# Altium PCB Sheet1.PCBDOC
Units mil, origin at the board's own origin, x right, y up, seen from the top; angles counter-clockwise.
Board outline 11800 x 7870 mil, 2 copper layers (Top Layer, Bottom Layer); 9 components, 16 nets, 62 pads, 0 vias.
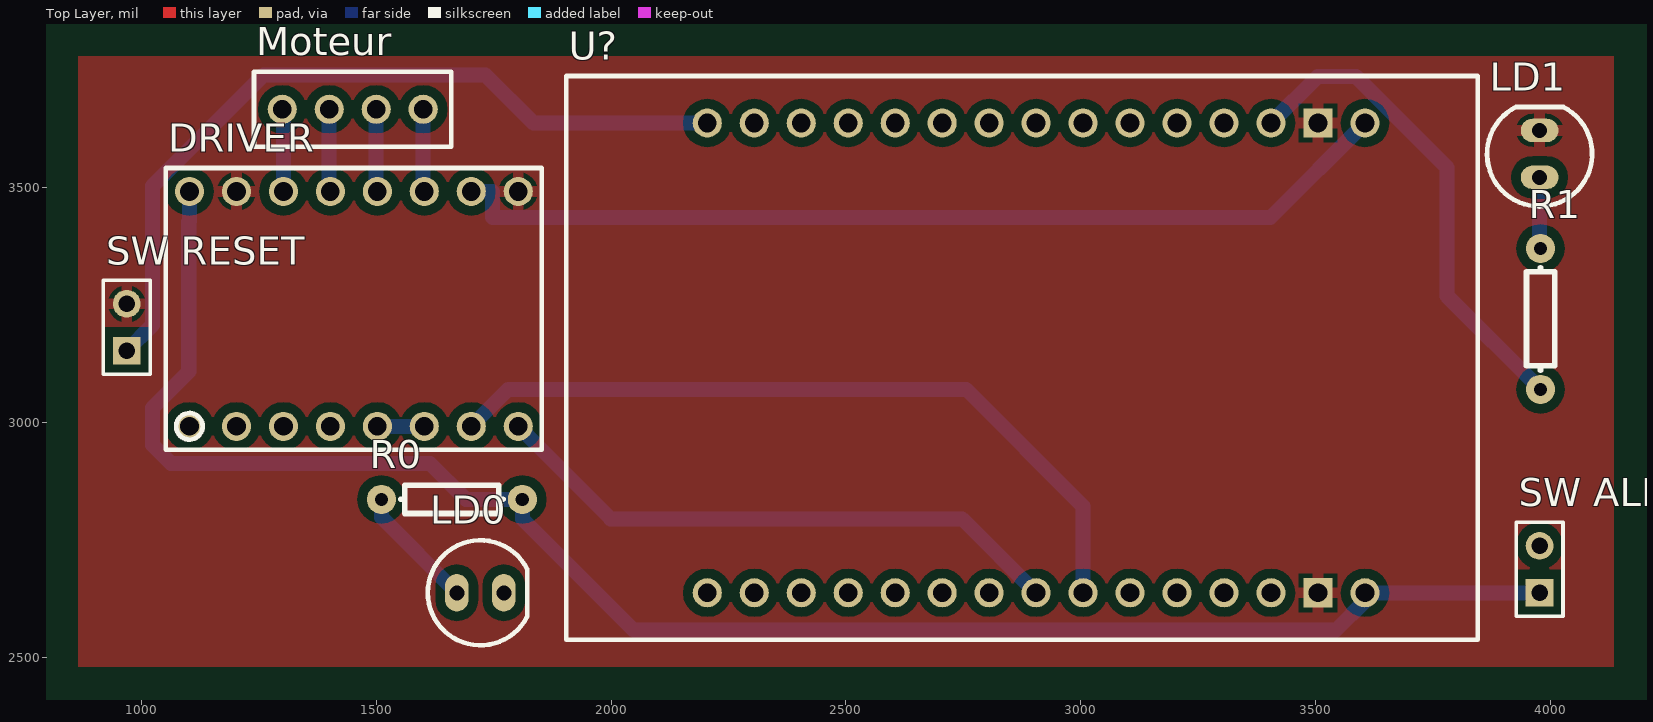
[diagram p0: Top Layer view]
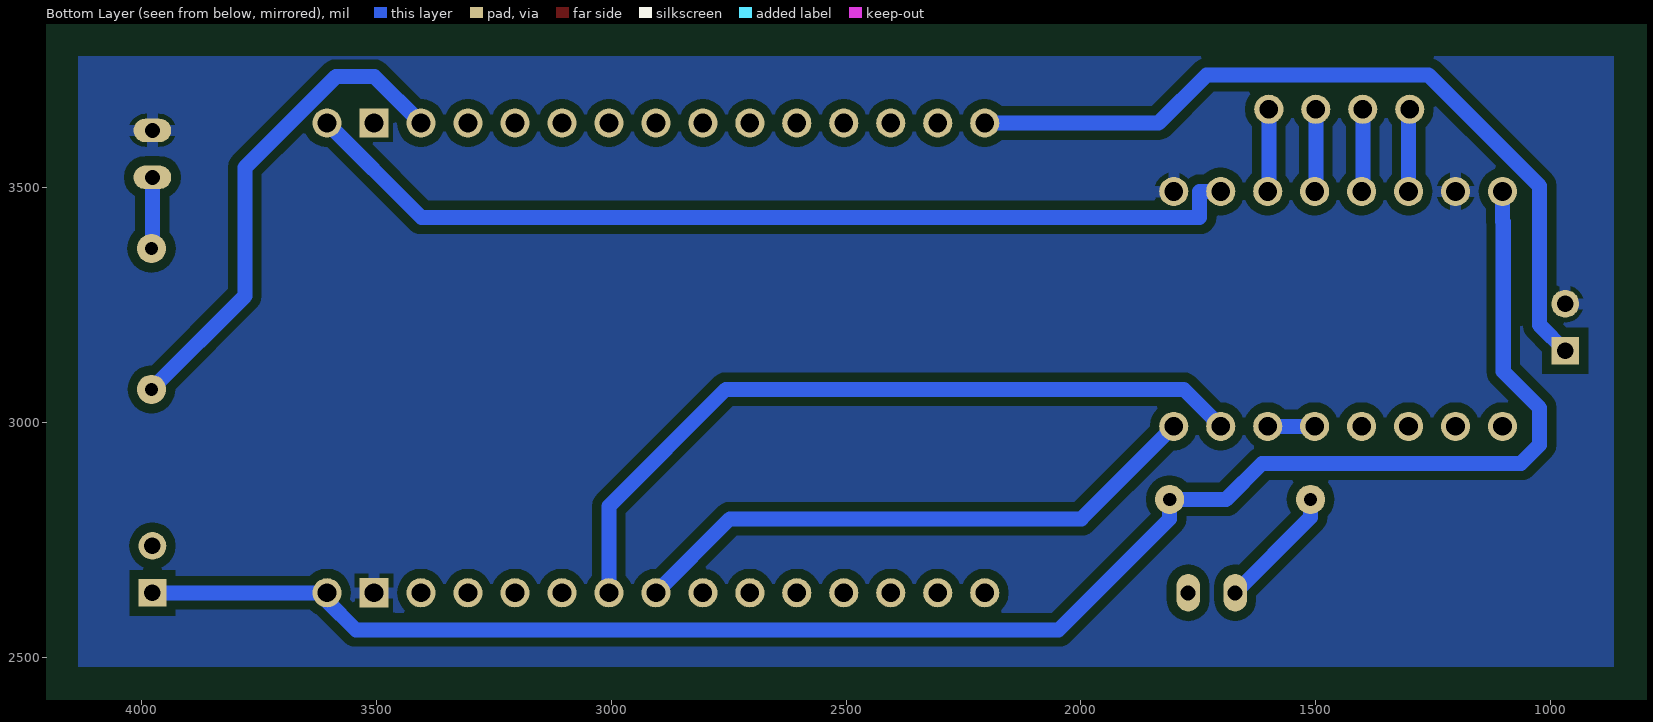
[diagram p1: Bottom Layer view, seen from below]

## Layer stack, top to bottom
Top Solder: solder mask 0.4, Solder Resist, Dk 3.5
Top Layer: signal copper 1.4
Dielectric1: dielectric 12.6, FR-4, Dk 4.8
Bottom Layer: signal copper 1.4
Bottom Solder: solder mask 0.4, Solder Resist, Dk 3.5

## Board outline
-5576.97,-1826.38 6223.03,-1826.38 6223.03,6043.62 -5576.97,6043.62

## Design rules (kind name [scope] priority, off if disabled: settings)
Clearance Clearance_bottom_polygon [OnLayer('Bottom Layer') Or OnLayer('Multi-Layer') vs OnLayer('Bottom Layer')  And  InPoly] p1: gap=20
Clearance Clearance_bottom_polygon_keepout [OnLayer('Bottom Layer') Or OnLayer('Multi-Layer') Or InPoly vs OnLayer('Keepout')] p2: gap=0
Clearance Clearance_top_polygon [OnLayer('Top Layer')  Or OnLayer('Multi-Layer') vs OnLayer('Top Layer') And InPoly] p3: gap=20
Clearance Clearance_bottom [OnLayer('Bottom Layer') Or OnLayer('Multi-Layer') vs OnLayer('Bottom Layer')  And Not InPoly] p4: gap=8
Clearance Clearance_top [OnLayer('Top Layer')  Or OnLayer('Multi-Layer') vs OnLayer('Top Layer') And Not InPoly] p5: gap=8
Clearance Clearance_pad_to_pad [OnLayer('Multi-Layer') vs OnLayer('Multi-Layer')] p6: gap=10
ComponentClearance ComponentClearance_bottom [OnLayer('Bottom Overlay') vs OnLayer('Bottom Overlay')] p1: gap=0 collisioncheckmode=3 verticalgap=10 showdistances=FALSE
ComponentClearance ComponentClearance_top [OnLayer('Top Overlay') vs OnLayer('Top Overlay')] p2: gap=0 collisioncheckmode=3 verticalgap=10 showdistances=FALSE
FabricationTestPointUsage TestPointUsage [All] p1: valid=0 allowmultiple=FALSE
FabricationTestpoint Testpoint [All] p1: side=3 testpointundercomponent=TRUE minsize=40 maxsize=100 preferedsize=60 minholesize=0 maxholesize=40 preferedholesize=32 testpointgrid=1 allowsidetop=TRUE allowsidebottom=TRUE usegrid=TRUE gridtolerance=0.01
HoleSize [All] p1: absolutevalues=TRUE maxlimit=1000 minlimit=16 maxpercent=80.000 minpercent=20.000
MinimumAnnularRing [PadXSize_AllLayers = PadYSize_AllLayers] p1: minimumring=10
PermittedLayers [All] p1: toplayerpermitted=TRUE bottomlayerpermitted=TRUE
PolygonConnect [All] p1: connectstyle=Relief reliefconductorwidth=24 reliefentries=4 polygonreliefangle="90 Angle" airgapwidth=10
RoutingVias [All] p1: holewidth=16 width=50 viastyle="Through Hole" minholewidth=16 minwidth=50 maxholewidth=1000 maxwidth=1000
SMDToPlane [All] p1: distance=0
SolderMaskExpansion [All] p1: expansion=4
ViasUnderSMD [All] p1: allowed=FALSE
Width Width_botom_top [OnLayer('Bottom Layer') or OnLayer('Top Layer')] p1: maxlimit=10000 minlimit=32 preferedwidth=32 minimp=50.000000 maximp=50.000000 favimp=50.000000
26 further rules are at their usual default settings.

## Components (designator, comment, footprint, x,y, rotation, side; value= is the part's Value field where it differs from the comment)
DRIVER "Driver" Driver 1102.36,2992.13 r90 top
LD0 "comment" LED5 1771.65,2637.8 r90 top
LD1 "comment" LED5 3976.38,3622.05 r180 top
Moteur "Moteur" Moteur 1300,3667 r90 top
R0 "RES" AXIAL0.3 1811.02,2834.65 r180 top
R1 "RES" AXIAL0.3 3976.38,3070.87 r90 top
"SW ALIM" "Header 2" HDR1X2 3976.38,2637.8 r90 top
"SW RESET" "Header 2" HDR1X2 969,3153 r90 top
U? "ESP32devKit" ESP32 2204.72,2637.8 r90 top

## Footprints (in the part's own frame and the unit in brackets; to place one, negate y for a bottom-side part, rotate by r counter-clockwise, add the part's x,y. Pads: shape width x height; smd on the part's side, far side on the other; paste and mask are expansions set on the pad)
AXIAL0.3 [mil]
  round 62 hole 28: 1(0,-2) 2(300,-2)
  silkscreen extent 41,-32 259,28
Driver [mm]
  round 1.575 hole 1.016: 1(0,0) 2(0,-2.54) 3(0,-5.08) 4(0,-7.62) 5(0,-10.16) 6(0,-12.7) 7(0,-15.24) 8(0,-17.78) 9(12.7,-17.78) 10(12.7,-15.24) 11(12.7,-12.7) 12(12.7,-10.16) 13(12.7,-7.62) 14(12.7,-5.08) 15(12.7,-2.54) 16(12.7,0)
  silkscreen extent -1.27,-19.05 13.97,1.27
ESP32 [mm]
  round 1.575 hole 1.016: 0(0,0) 1(0,-2.54) 2(0,-5.08) 3(0,-7.62) 4(0,-10.16) 5(0,-12.7) 6(0,-15.24) 7(0,-17.78) 8(0,-20.32) 9(0,-22.86) 10(0,-25.4) 11(0,-27.94) 12(0,-30.48) 14(0,-35.56) 15(25.4,-35.56) 17(25.4,-30.48) 18(25.4,-27.94) 19(25.4,-25.4) 20(25.4,-22.86) 21(25.4,-20.32) 22(25.4,-17.78) 23(25.4,-15.24) 24(25.4,-12.7) 25(25.4,-10.16) 26(25.4,-7.62) 27(25.4,-5.08) 28(25.4,-2.54) 29(25.4,0)
  rect 1.575x1.575 hole 1.016: 13(0,-33.02) 16(25.4,-33.02)
  silkscreen extent -2.54,-41.66 27.94,7.62
HDR1X2 [mm] "Connector; Header; 2 Position"
  rect 1.5x1.5 hole 0.9: 1(0,0)
  round 1.5 hole 0.9: 2(2.54,0)
  silkscreen extent -1.27,-1.27 3.81,1.27
LED5 [mil] "5mm LED"
  oval 80x50 hole 32: A(0,100) K(0,0)
  silkscreen extent -112,-50 112,162
Moteur [mm]
  round 1.575 hole 1.016: 1(0,0) 2(0,-2.54) 3(0,-5.08) 4(0,-7.62)
  silkscreen extent -2.03,-9.14 2.03,1.52

## Part data
DRIVER: "Driver A4988"
LD0 LD1: library part LED, "LED 5mm/3mm/CMS"
R0 R1: "resistance"
"SW ALIM" "SW RESET": "Header, 2-Pin"

## Nets (pads, with @x,y where several pads share a name; then routed paths per layer and width w, separated by ;. In a path a pad name is that pad's centre, name@x,y a point inside that pad or via, vN(x,y) a via of type N, cw(c..) or ccw(c..) an arc to the next point about the centre after c; other vN are vias at no path point)
GND: "SW RESET.2" DRIVER.9 DRIVER.15 LD1.K U?.13 U?.16
Net*_0: "SW ALIM.2"
NetDRIVER_5: DRIVER.5 DRIVER.6 | length 100
  Bottom Layer w32: DRIVER.5 DRIVER.6
NetDRIVER_7: DRIVER.7 U?.8 | length 1622.3
  Bottom Layer w32: DRIVER.7 1781.1,3070.87 2755.91,3070.87 3004.72,2822.05 U?.8
NetDRIVER_8: DRIVER.8 U?.7 | length 1249.1
  Bottom Layer w32: DRIVER.8 1999.21,2795.28 2747.24,2795.28 U?.7
NetDRIVER_10: DRIVER.10 U?.15 | length 2040.5
  Bottom Layer w32: DRIVER.10 1747.36,3492.13 1747.36,3437.12 3404.05,3437.12 U?.15
NetDRIVER_11: DRIVER.11 Moteur.4 | length 175.9
  Bottom Layer w32: Moteur.4 1600,3494.49 DRIVER.11
NetDRIVER_12: DRIVER.12 Moteur.3 | length 175.9
  Bottom Layer w32: Moteur.3 1500,3494.49 DRIVER.12
NetDRIVER_13: DRIVER.13 Moteur.2 | length 175.9
  Bottom Layer w32: Moteur.2 1400,3494.49 DRIVER.13
NetDRIVER_14: DRIVER.14 Moteur.1 | length 175.9
  Bottom Layer w32: Moteur.1 1302.36,3664.64 DRIVER.14
NetDRIVER_16: "SW ALIM.1" DRIVER.16 R0.1 U?.14 | length 3754.8
  Bottom Layer w32: DRIVER.16 1102.36,3428.36 1101,3427 1101,3108.87 1023.62,3031.5 1023.62,2952.76 1062.99,2913.39 1614.17,2913.39 1690.91,2836.65 R0.1 1811.02,2795.28 2047.24,2559.06 3543.31,2559.06 3604.72,2620.47 U?.14 3976.38,2637.8
NetLD0_A: LD0.A R0.2 | length 265.4
  Bottom Layer w32: R0.2 1511.02,2798.43 LD0.A
NetLD0_K: LD0.K
NetLD1_A: LD1.A R1.2 | length 154.8
  Top Layer w32: R1.2@3976.38,3372.87 R1.2
  Bottom Layer w32: LD1.A 3976.38,3372.87 R1.2
NetR1_1: R1.1 U?.17 | length 1050.9
  Bottom Layer w32: U?.17 3503.94,3737.01 3585.83,3737.01 3779.53,3543.31 3779.53,3269.72 R1.1
"NetSW RESET_1": "SW RESET.1" U?.29 | length 1694.9
  Bottom Layer w32: 969,3153 1023.62,3207.62 1023.62,3503.94 1259.84,3740.16 1732.28,3740.16 1834.65,3637.8 U?.29
pads on no net: DRIVER.1 DRIVER.2 DRIVER.3 DRIVER.4 U?.0 U?.1 U?.2 U?.3 U?.4 U?.5 U?.6 U?.9 U?.10 U?.11 U?.12 U?.18 U?.19 U?.20 U?.21 U?.22 U?.23 U?.24 U?.25 U?.26 U?.27 U?.28

## Polygon pours and split planes (outlines as drawn)
GND on Top Layer "Top Layer-No Net" (solid, pour order 19): 866.14,2480.32 4133.86,2480.32 4133.86,3779.53 866.14,3779.53
GND on Bottom Layer "Top Layer-No Net" (solid, pour order 21): 866.14,2480.32 4133.86,2480.32 4133.86,3779.53 866.14,3779.53

## Keep-outs
Keep-Out Layer:
  rectangle: -5539.17,-1819.28 -5342.32,6054.73
  rectangle: -5342.32,-1819.28 6075,-1622.43
  rectangle: 5878.15,-1622.43 6075,6054.73
  rectangle: -5342.32,5857.88 5878.15,6054.73

## Silkscreen, mask and mechanical layers (free items; w line width, h text height)
Mechanical 1:
  lines w32: 866.14,2480.32 866.14,3779.53 4133.86,3779.53 4133.86,2480.32 866.14,2480.32
Mechanical 32:
  text "Les bandes en violet delimitent la surface utilisable...." at -5030,6664 h200
  text "Mais vous n'etes pas obliges de tout utiliser!!" at -4330,6248 h200
  text "ATTENTION:" at 6521,5511 h200
  text "Par defaut, les pistes" at 6521,5101 h200
  text "ont 32mil de largeur" at 6516,4723 h200
  text "En cas de besoin, cette largeur" at 6527,4361 h200
  text "peut etre reduite jusqu'a 10 mil" at 6516,3953 h200
  text "Par defaut, les vias" at 6544,3254 h200
  text "ont un diam. de 50 mil" at 6538,2854 h200
  text "En cas de besoin, ce diam." at 6504,2378 h200
  text "peut etre reduit jusqu'a 36 mil" at 6528,1948 h200